# EAGLE board pnp_fuzz_face_clone_v.0.2 (EAGLE 5.07)
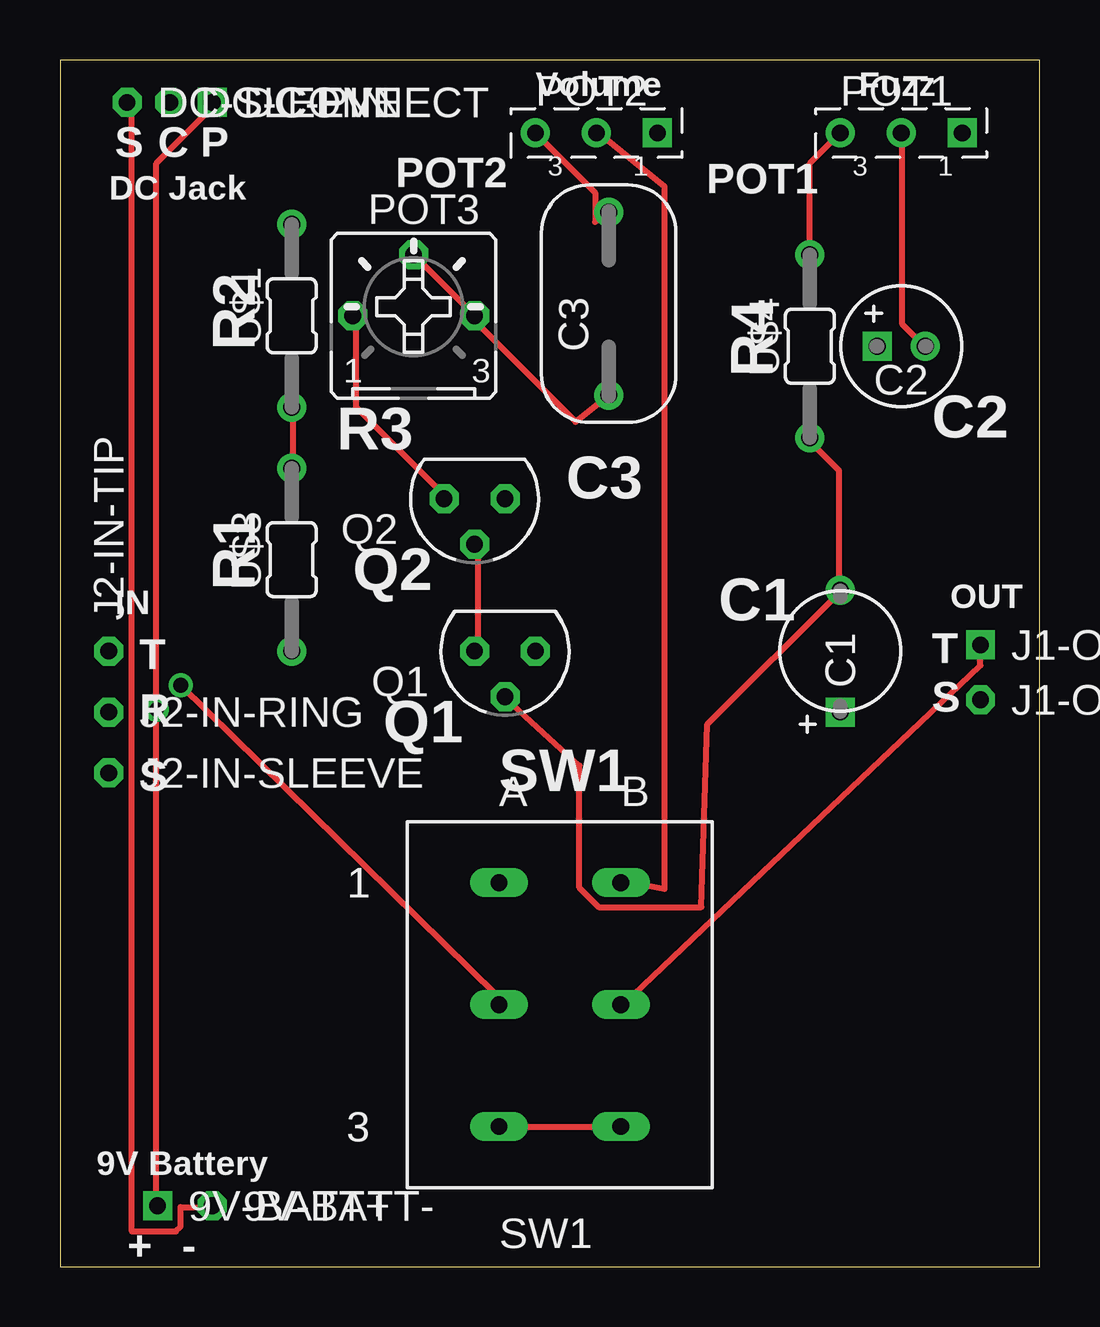
[diagram p0: board, top side]
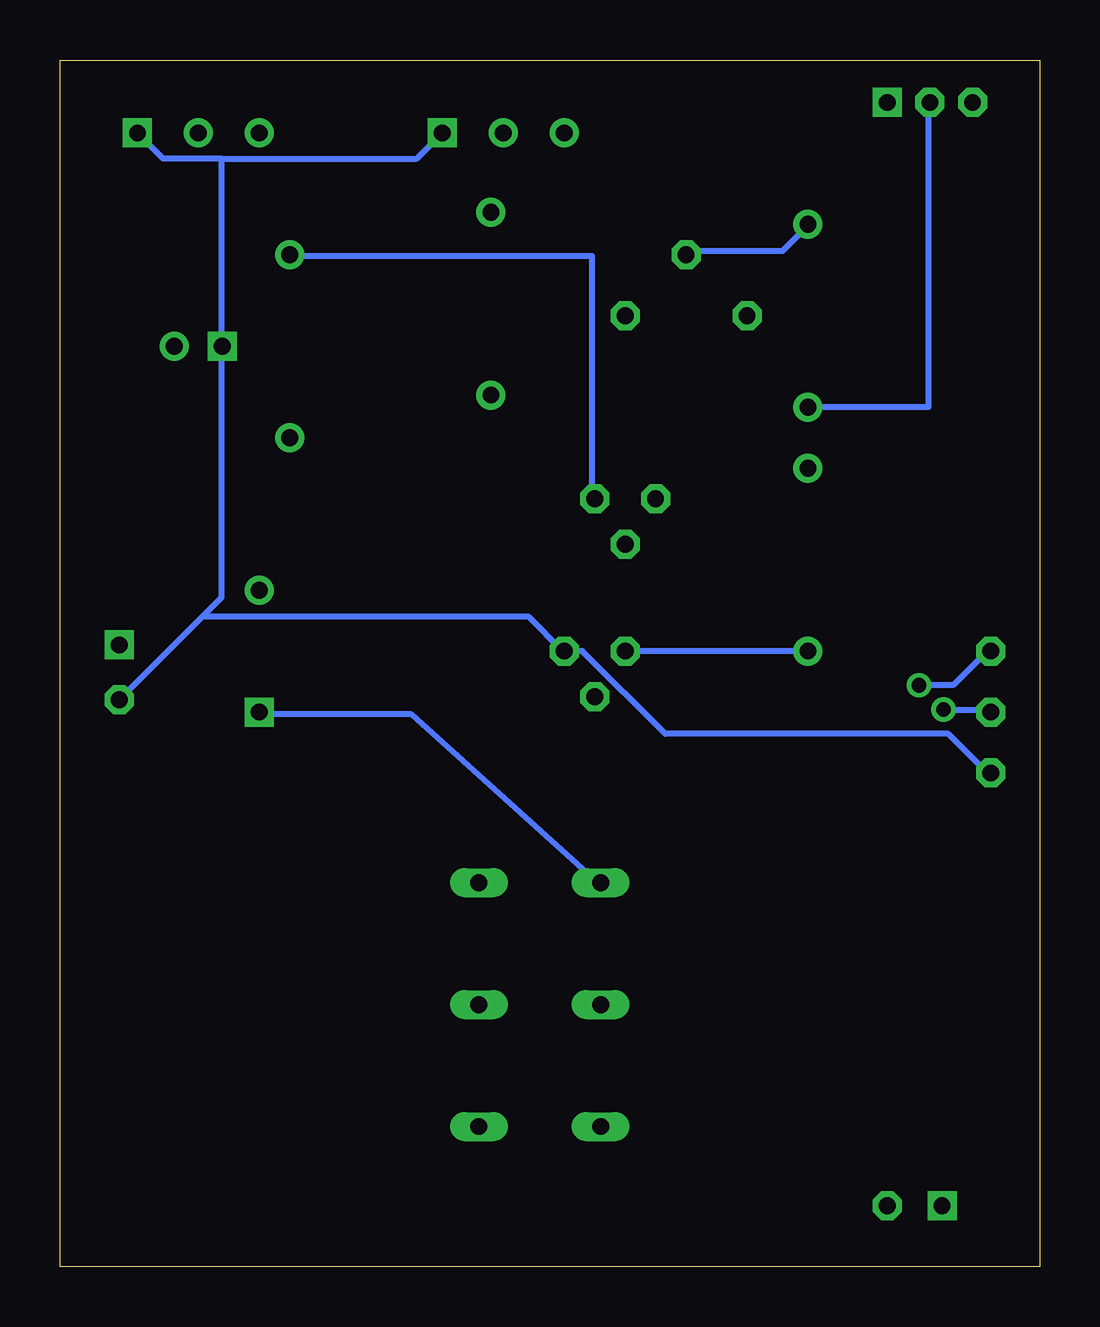
[diagram p1: board, bottom side, seen from below]

Size 40.82 x 50.28 mm. Coordinates in mm from the lower left corner, seen from the top.
Outline: 0,0 40.82,0 40.82,50.28 0,50.28 0,0
Copper layers (1*16): Top 0.035mm / dielectric 1.5mm / Bottom 0.035mm
Design rules "default": minimum track width 10mil, minimum drill 24mil, track to track 8mil, track to pad 8mil, pad to pad 8mil, via to via 8mil, smd to smd 8mil, copper to edge 40mil, drill to drill 8mil, minimum pad ring 10mil, minimum via ring 8mil, stop-mask expansion 4mil, vias tented up to drill 0mil, thermal gap 10mil

## Footprints (pad centres in the part's own frame; a part is rotated, then mirrored left to right if it is on the bottom)
SQUARE = drill 0.7 square: 1 0,0
OCTOGON = drill 0.7 octagon: 1 0,0
050_020_2 = drill 0.7 square: + -2.54,0 | drill 0.7 round: - 2.54,0
050_020 = drill 0.7 square: + -1,0 | drill 0.7 round: - 1,0
099X056_3 = drill 0.7 round: 1 -3.81,0; 2 3.81,0
POT = drill 0.7 square: 1 2.54,0 | drill 0.7 round: 2 0,0; 3 -2.54,0
B25P = drill 0.7 octagon: 1 -2.54,0; 2 0,2.54; 3 2.54,0
TO92 = drill 0.7 octagon: 1 1.27,0; 2 0,1.905; 3 -1.27,0
DPDT = drill 0.7 long: A1 -2.54,5.08; A2 -2.54,0; A3 -2.54,-5.08; B1 2.54,5.08; B2 2.54,0; B3 2.54,-5.08
R0204/3 = drill 0.7 round: 1 -3.81,0; 2 3.81,0

## Placement (x,y rotation side)
9V-BATT+  [SQUARE]  4.06,2.54 0 top
9V-BATT-  [OCTOGON]  6.35,2.54 0 top
C1  [050_020_2]  32.51,25.65 90 top
C2  [050_020]  35.05,38.35 0 top
C3  [099X056_3]  22.86,40.13 90 top
DC-CONNECT  [OCTOGON]  4.57,48.51 0 top
DC-PIN  [SQUARE]  6.35,48.51 0 top
DC-SLEEVE  [OCTOGON]  2.79,48.51 0 top
J1-OUT-SLEEVE  [OCTOGON]  38.35,23.62 0 top
J1-OUT-TIP  [SQUARE]  38.35,25.91 0 top
J2-IN-RING  [OCTOGON]  2.03,23.11 0 top
J2-IN-SLEEVE  [OCTOGON]  2.03,20.57 0 top
J2-IN-TIP  [OCTOGON]  2.03,25.65 90 top
POT1  [POT]  35.05,47.24 0 top
POT2  [POT]  22.35,47.24 0 top
POT3  [B25P]  14.73,39.62 0 top
Q1  2N5087  [TO92]  18.54,25.65 180 top
Q2  2N5087  [TO92]  17.27,32 180 top
SW1  DPDT  [DPDT]  20.83,10.92 0 top
U$1  3MM.3  [R0204/3]  9.65,39.62 90 top
U$3  3MM.3  [R0204/3]  9.65,29.46 90 top
U$4  3MM.3  [R0204/3]  31.24,38.35 90 top

## Library data of the parts
9V-BATT+ 9V-BATT- DC-CONNECT DC-PIN DC-SLEEVE J1-OUT-SLEEVE J1-OUT-TIP J2-IN-RING J2-IN-SLEEVE J2-IN-TIP = gm-supply
C1 C2 = gm-caps-electro-pol
C3 = gm-caps-mica
POT1-POT3 = gm-pots
Q1 Q2 = gm-trans
SW1 = gm-switches
U$1 U$3 U$4 = gm-resistors

## Nets
+9V: C2.+ J1-OUT-SLEEVE.1 J2-IN-SLEEVE.1 POT1.1 POT2.1 Q1.3
-9V: DC-CONNECT.1 U$1.1 U$3.2
N$1: C1.- Q1.2 U$4.1
N$2: 9V-BATT-.1 DC-SLEEVE.1
N$3: 9V-BATT+.1 DC-PIN.1 J2-IN-RING.1
N$4: POT2.2 SW1.B1
N$5: SW1.A3 SW1.B3
N$6: J1-OUT-TIP.1 SW1.B2
N$7: J2-IN-TIP.1 SW1.A2
N$8: POT1.3 Q2.3 U$4.2
N$9: Q1.1 Q2.2 U$3.1
N$10: POT3.1 Q2.1
N$11: C1.+ SW1.A1
N$12: C3.1 POT3.2 POT3.3 U$1.2
N$13: C3.2 POT2.3
N$14: C2.- POT1.2

## Tracks (layer width: path | path; a pad name or v marks a point on that pad's centre or on a via)
+9V
  Bottom 0.254: 34.09,46.18 34.09,38.46 C2.+ 34.09,38.25 34.09,27.89 34.9,27.08 | 34.09,46.18 36.52,46.18 POT1.1 | 34.09,46.18 25.96,46.18 POT2.1 | 34.9,27.08 J1-OUT-SLEEVE.1 | 34.9,27.08 21.29,27.08 19.86,25.65 Q1.3 19.05,25.65 15.6,22.2 3.81,22.2 2.18,20.57 J2-IN-SLEEVE.1
-9V
  Top 0.254: U$3.2 9.7,33.38 9.7,35.81 U$1.1
  Bottom 0.254: DC-CONNECT.1 4.62,48.41 4.62,35.81 U$1.1
N$1
  Top 0.254: Q1.2 18.64,23.62 21.64,20.88 21.64,15.8 22.45,14.99 26.72,14.99 26.98,22.61 32.46,28.09 C1.- 32.46,28.3 32.46,33.17 31.24,34.39 U$4.1
N$2
  Top 0.254: 9V-BATT-.1 6.25,2.49 5.03,2.49 5.03,1.68 4.83,1.47 3,1.47 3,48.21 2.79,48.41 DC-SLEEVE.1
N$3  (via drill 0.61)
  Top 0.254: 9V-BATT+.1 4.01,2.69 v4.01,23.22 4.01,45.97 6.45,48.41 DC-PIN.1
  Bottom 0.254: v4.01,23.22 2.18,23.22 J2-IN-RING.1
N$4
  Top 0.254: SW1.B1 23.32,16.1 25.2,15.75 25.2,45.01 22.5,47.19 POT2.2
N$5
  Top 0.254: SW1.A3 SW1.B3
N$6
  Top 0.254: SW1.B2 23.47,10.92 38.35,25.04 J1-OUT-TIP.1
N$7  (via drill 0.61)
  Top 0.254: v5.03,24.23 18.19,11.33 18.19,10.92 SW1.A2
  Bottom 0.254: v5.03,24.23 3.61,24.23 2.18,25.65 J2-IN-TIP.1
N$8
  Top 0.254: POT1.3 31.24,45.97 U$4.2
  Bottom 0.254: Q2.3 18.64,32.16 18.64,42.11 31.24,42.11 U$4.2
N$9
  Top 0.254: Q2.2 17.42,29.92 17.42,25.65 Q1.1
  Bottom 0.254: U$3.1 Q1.1
N$10
  Top 0.254: Q2.1 16,32.16 12.34,35.81 12.34,39.47 POT3.1
N$11
  Bottom 0.254: SW1.A1 18.39,16 26.16,23.01 32.46,23.01 C1.+
N$12
  Top 0.254: C3.1 21.49,35.2 17.42,39.27 17.42,39.47 POT3.3 POT3.2
  Bottom 0.254: 9.7,43.54 U$1.2 9.7,43.33 10.72,42.32 14.58,42.32 POT3.2 14.78,42.32
N$13
  Top 0.254: POT2.3 22.3,44.76 22.3,43.54 C3.2
N$14
  Top 0.254: C2.- 35.92,38.46 35.1,39.27 35.1,47.19 POT1.2

## Text on the board
tPlace: Volume | Fuzz | S | C | P | POT2 | POT1 | DC Jack | R2 | R4 | R3 | C2 | C3 | R1 | Q2 | IN | C1 | OUT | T | T | R | S | Q1 | S | SW1 | 9V Battery | + | -